# Altium PCB RechargeablePCB.PcbDoc
Units mil, origin at the board's own origin, x right, y up, seen from the top; angles counter-clockwise.
Board outline 2255 x 2330 mil, 2 copper layers (Top Layer, Bottom Layer); 23 components, 19 nets, 82 pads, 20 vias.
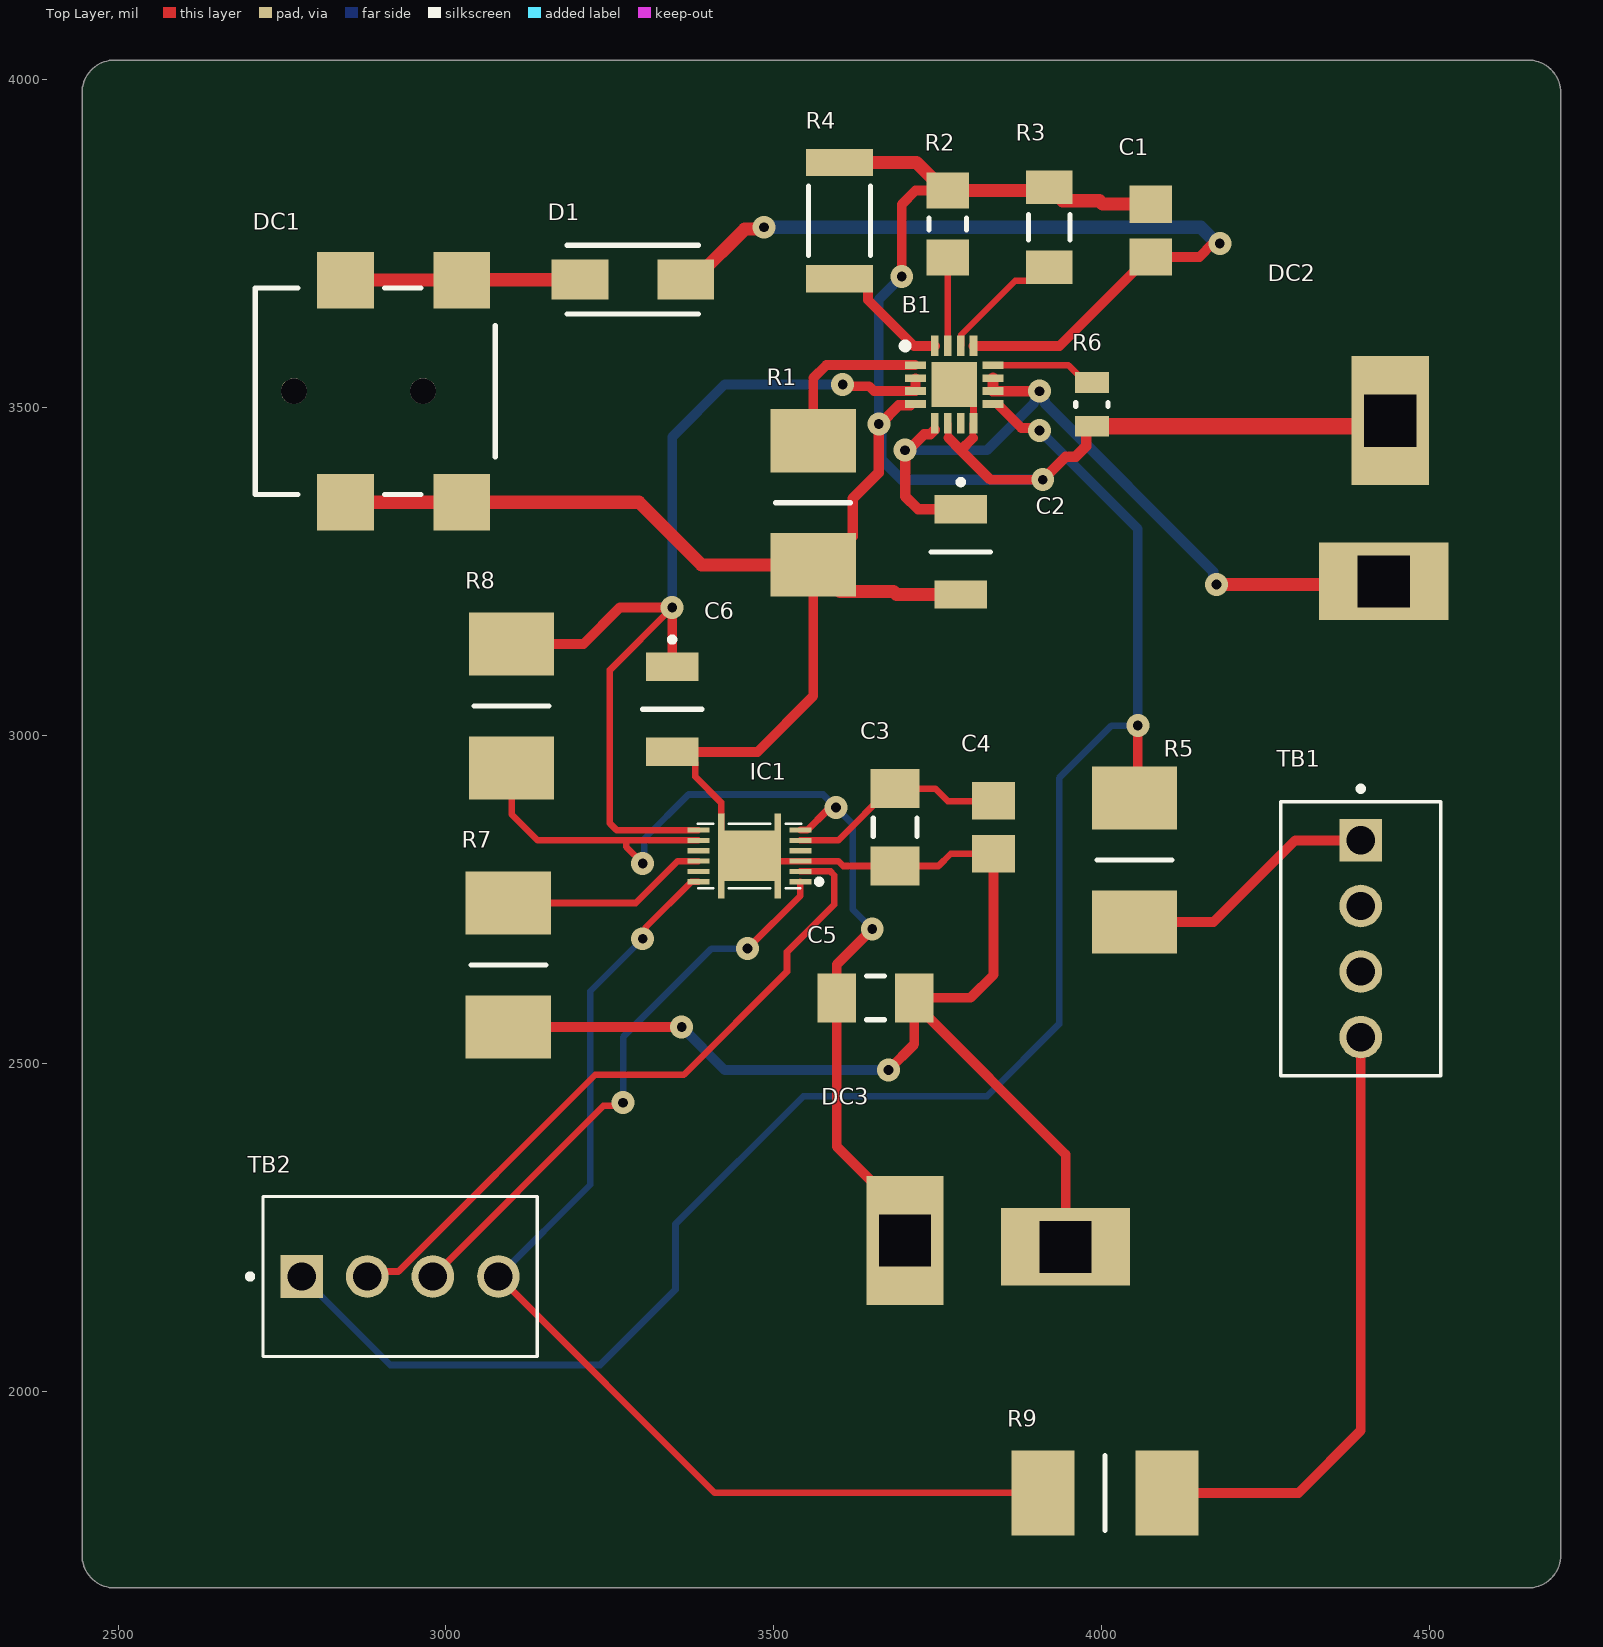
[diagram p0: Top Layer view]
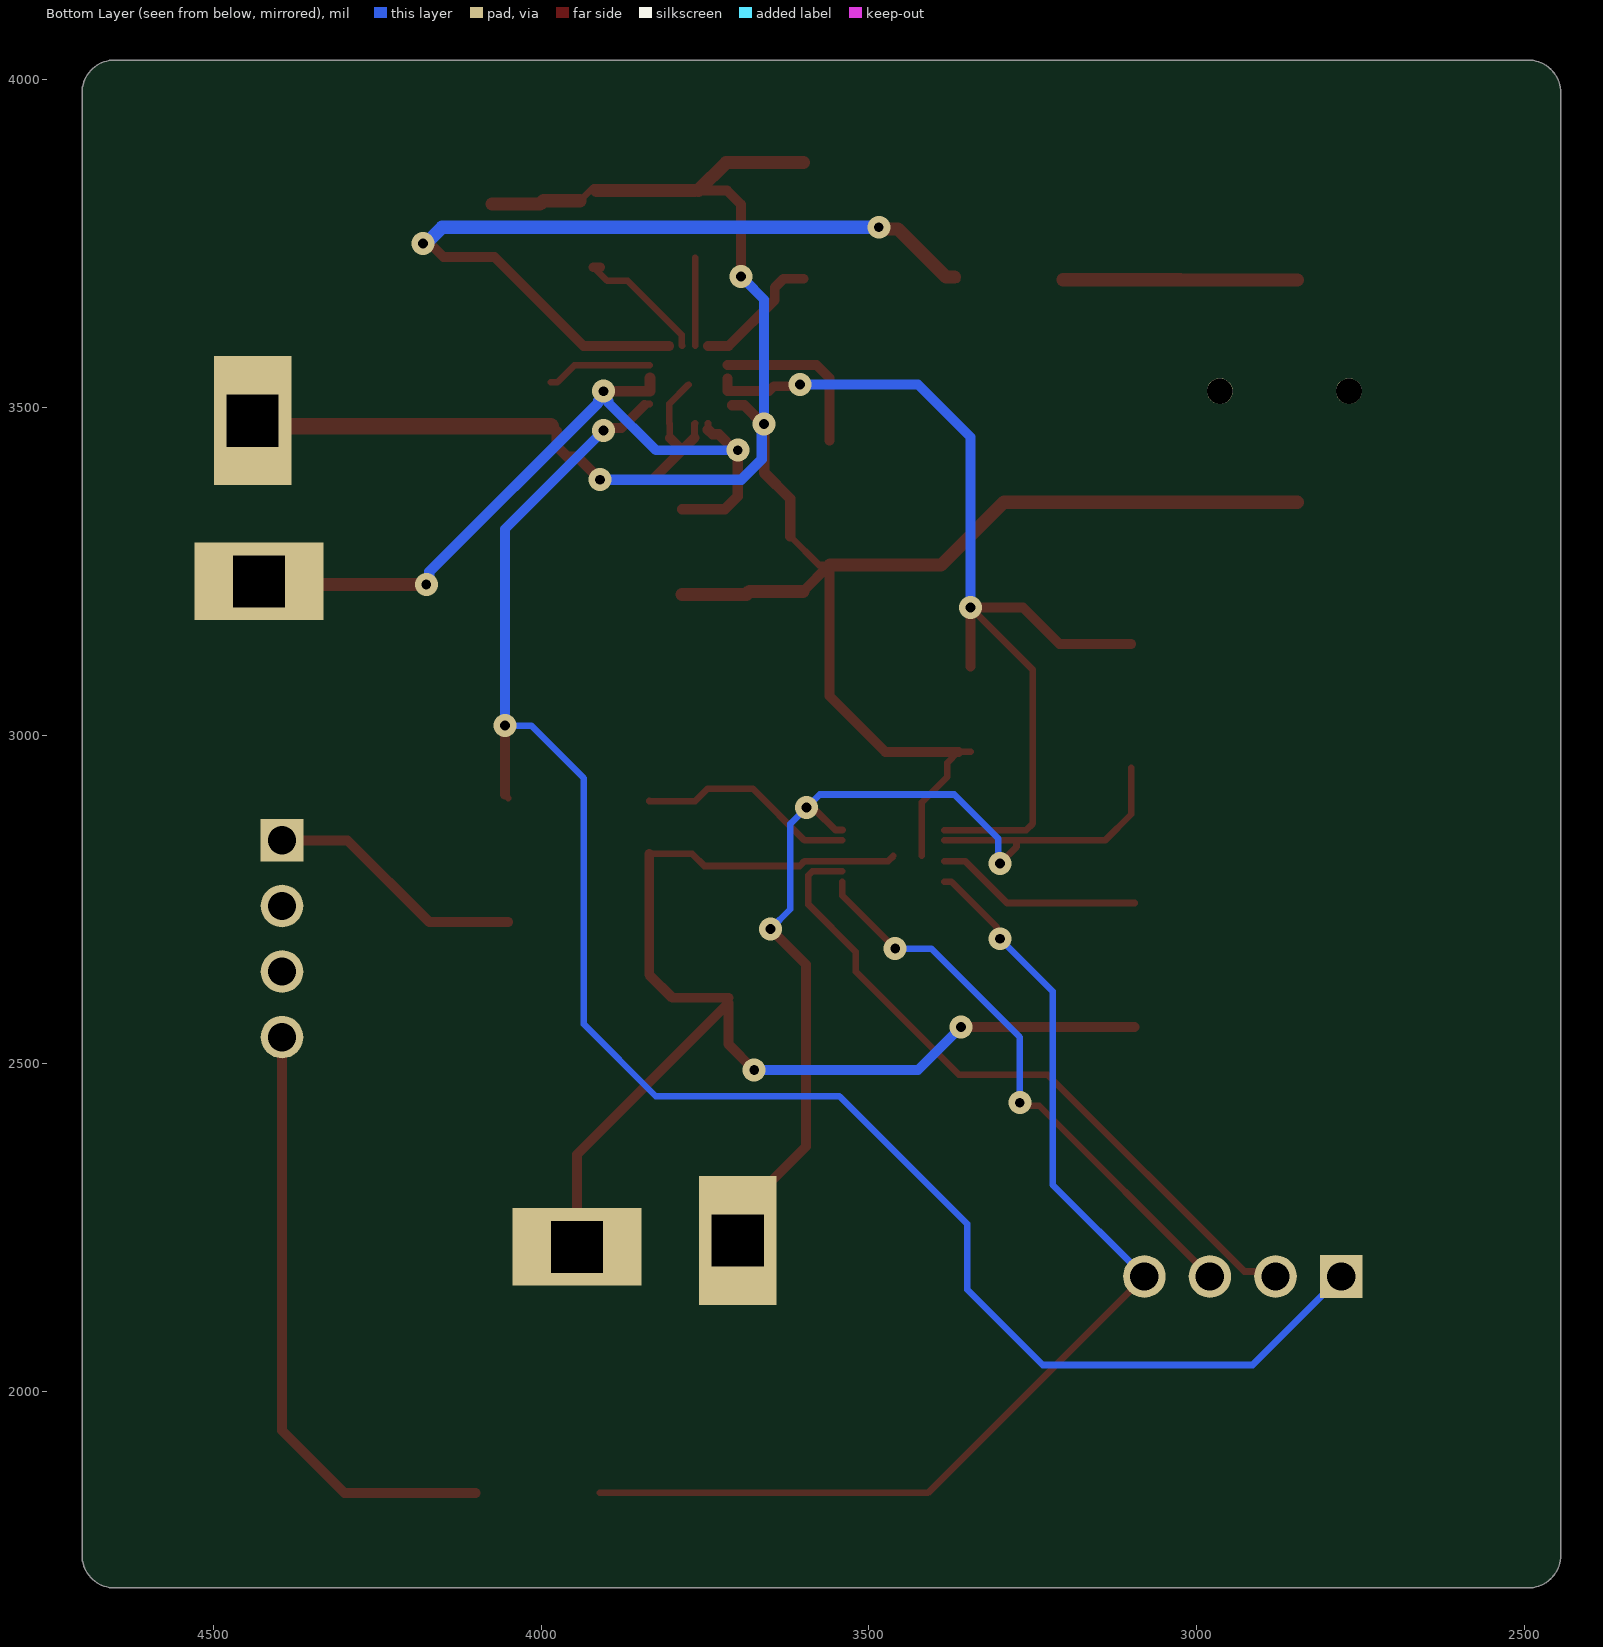
[diagram p1: Bottom Layer view, seen from below]
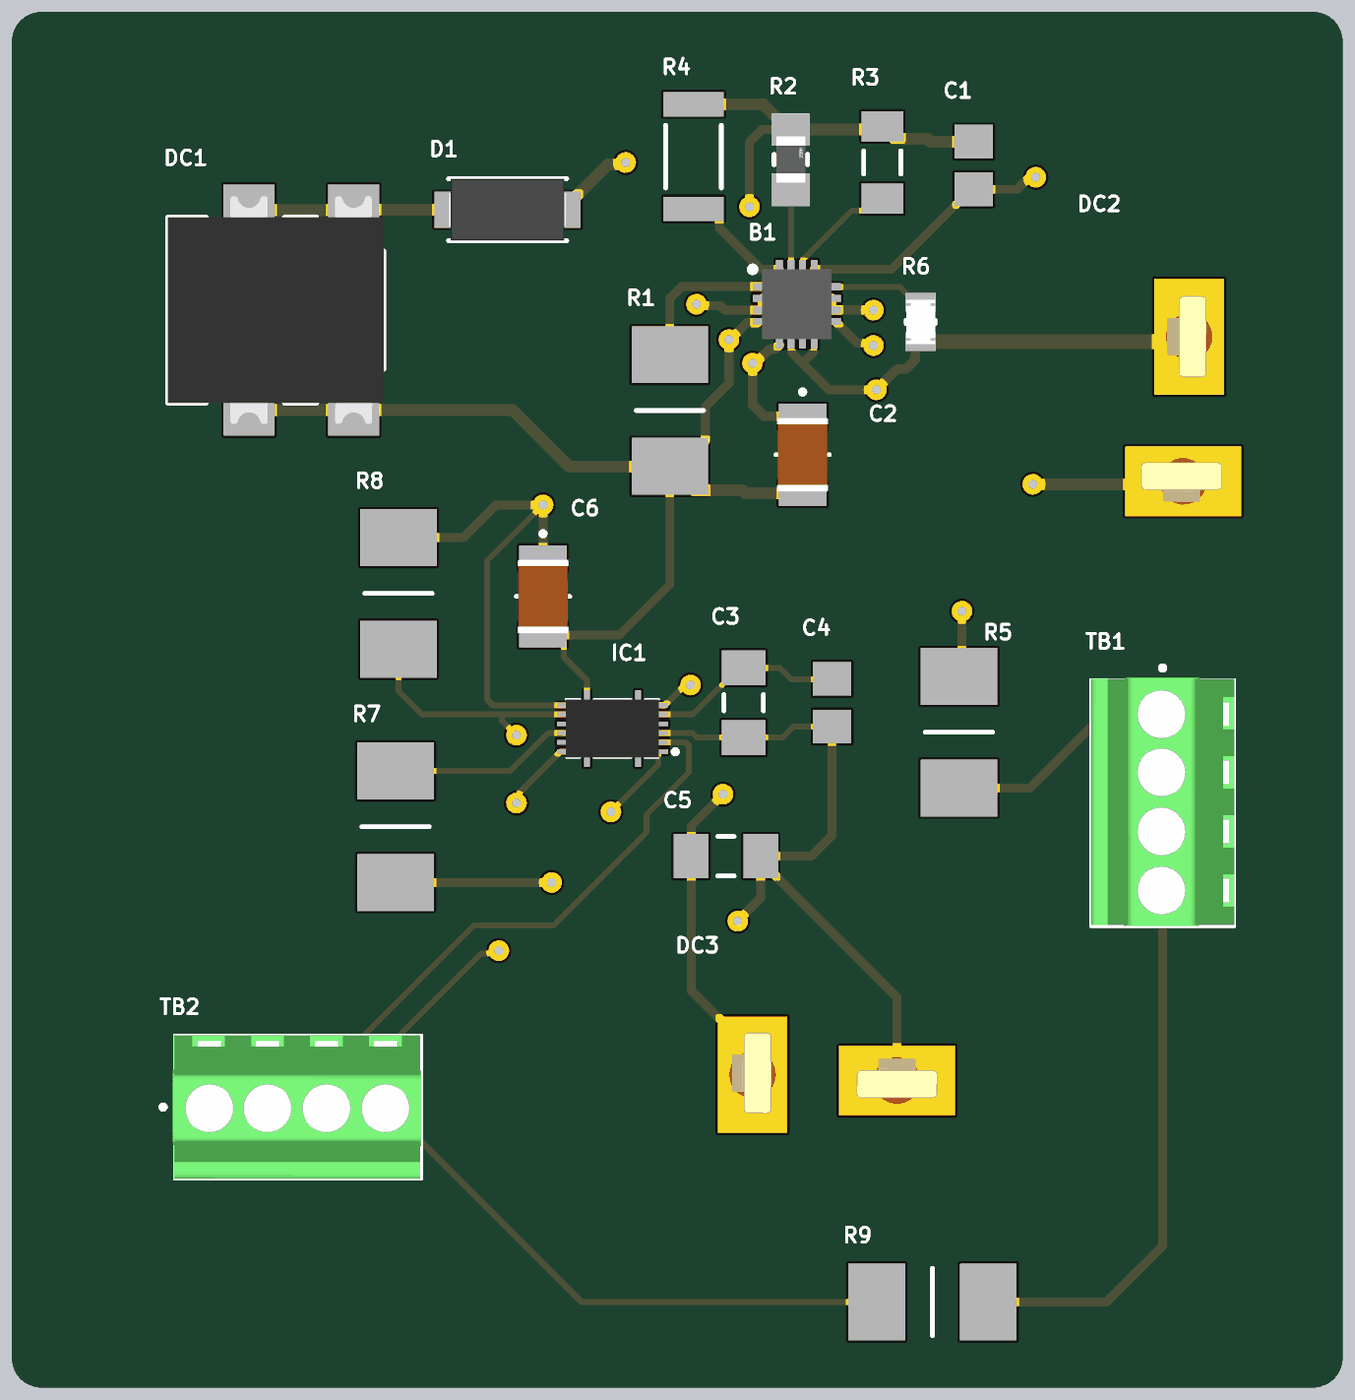
[diagram p2: 3D render of the assembled board from above, using the file's embedded part models]

## Layer stack, top to bottom
Top Solder: solder mask 0.4, Solder Resist, Dk 3.5
Top Layer: signal copper 1.4
Dielectric 1: dielectric 12.6, FR-4, Dk 4.8
Bottom Layer: signal copper 1.4
Bottom Solder: solder mask 0.4, Solder Resist, Dk 3.5

## Board outline
2445,1750 ccw(c2495,1750) 2495,1700 4650,1700 ccw(c4650,1750) 4700,1750 4700,3980 ccw(c4650,3980) 4650,4030 2495,4030 ccw(c2495,3980) 2445,3980

## Design rules (kind name [scope] priority, off if disabled: settings)
Clearance [All] p1: gap=5 ignorepadtopadclearanceinfootprint=FALSE
ComponentClearance [All] p1 off: gap=10 collisioncheckmode=3 verticalgap=10 showdistances=FALSE
DiffPairsRouting [All] p1: maxlimit=13 minlimit=13 mostfreqgap=13 toplayer_minwidth=7.42 toplayer_maxwidth=13 toplayer_prefwidth=7.42 bottomlayer_minwidth=7.42 bottomlayer_maxwidth=13 bottomlayer_prefwidth=7.42 maxuncoupledlength=500
FabricationTestPointUsage TestPointUsage [All] p1: valid=0 allowmultiple=FALSE
FabricationTestpoint Testpoint [All] p1: side=3 testpointundercomponent=TRUE minsize=40 maxsize=100 preferedsize=60 minholesize=20 maxholesize=40 preferedholesize=32 testpointgrid=1 allowsidetop=TRUE allowsidebottom=TRUE usegrid=TRUE gridtolerance=0.01
Height [All] p1 off: minheight=0 maxheight=1000 prefheight=500
HoleSize [All] p1: absolutevalues=TRUE maxlimit=800 minlimit=10 maxpercent=80.000 minpercent=20.000
MatchedLengths MatchedLengths_I210Rx [InNetClass('I210Rx')] p1: tolerance=5 checknetsindiffpair=FALSE checkdiffpairvsdiffpair=TRUE checkxsignals=TRUE checkothers=TRUE
MatchedLengths MatchedLengths_I210Tx [InNetClass('I210Tx')] p2: tolerance=5 checknetsindiffpair=FALSE checkdiffpairvsdiffpair=TRUE checkxsignals=TRUE checkothers=TRUE
MatchedLengths MatchedLengths_mSATARx [InNetClass('mSATARx')] p3: tolerance=25 checknetsindiffpair=FALSE checkdiffpairvsdiffpair=TRUE checkxsignals=TRUE checkothers=TRUE
MatchedLengths MatchedLengths_mSATATx [InNetClass('mSATATx')] p4: tolerance=25 checknetsindiffpair=FALSE checkdiffpairvsdiffpair=TRUE checkxsignals=TRUE checkothers=TRUE
MatchedLengths MatchedLengths_PCIECLK [InNetClass('PCIECLK')] p5: tolerance=25 checknetsindiffpair=FALSE checkdiffpairvsdiffpair=TRUE checkxsignals=TRUE checkothers=TRUE
MatchedLengths MatchedLengths_PCIETx [InNetClass('PCIETx')] p6: tolerance=5 checknetsindiffpair=FALSE checkdiffpairvsdiffpair=TRUE checkxsignals=TRUE checkothers=TRUE
MatchedLengths MatchedLengths_PCIERx [InNetClass('PCIERx')] p7: tolerance=5 checknetsindiffpair=FALSE checkdiffpairvsdiffpair=TRUE checkxsignals=TRUE checkothers=TRUE
MinimumSolderMaskSliver [All] p1: minsoldermaskwidth=5
PlaneConnect [All] p1: planeconnectstyle=Relief reliefexpansion=20 reliefentries=4 reliefconductorwidth=15 reliefairgap=10
PolygonConnect [All] p1: connectstyle=Direct reliefconductorwidth=20 reliefentries=4 polygonreliefangle="90 Angle" airgapwidth=30
RoutingVias [All] p1: holewidth=20 width=40 viastyle="Through Hole" minholewidth=15 minwidth=35 maxholewidth=28 maxwidth=50
SilkToSilkClearance [All] p1: silktosilkclearance=5
SilkToSolderMaskClearance SilkscreenOverComponentPads [IsPad] p1: minsilkscreentomaskgap=5 clearancetoexposedcopper=TRUE
SolderMaskExpansion [All] p1: expansion=4 istentingtop=FALSE
SupplyNets "Schematic Supply Nets" [InNet('GND')] p1: voltage=0.000
Width [All] p1: maxlimit=500 minlimit=5 preferedwidth=10
20 further rules are at their usual default settings.

## Components (designator, comment, footprint, x,y, rotation, side; value= is the part's Value field where it differs from the comment)
B1 "BQ24232HRGTR" QFN50P300X300X100-17N-D 3775,3535 r0 top
C1 "0.1uF 16V" CAPC2113X100X50ML30T10 4075,3770 r90 top
C2 "GRM32DR71C106KA01L" GRM32DR61C106KA01L 3785,3280 r270 top
C3 "C1206C105K3RACTU" CAPC3216X180X50ML20T25 3685,2860 r90 top
C4 "0.1uF 16V" CAPC2113X100X50ML30T10 3835,2860 r90 top
C5 "C1206C105K3RACTU" CAPC3216X180X50ML20T25 3655,2600 r180 top
C6 "GRM32DR71C106KA01L" GRM32DR61C106KA01L 3345,3040 r270 top
D1 "CDBA340L-G" DIONM5127X229N 3285,3695 r180 top
DC1 "694102107102" 694102107102 2892.16,3525 r270 top
DC2 "Deans Connector" Deans 4445,3480 r90 top
DC3 "Deans Connector" Deans 3945,2215 r0 top
IC1 "BQ27441DRZR-G1A" BQ27441DRZRG1A 3462.76,2816.38 r90 top
R1 "CRM2512QJW-103ELF" RESC6331X80N 3560,3355 r90 top
R2 "RG2012V-1431-B-T5" FP-RG2012-MFG 3765,3780 r90 top
R3 "CRCW120656K2FKEA" RESC3216X60X45ML10T20 3920,3775 r270 top
R4 "1K74 1% 2010(5025)" RESC2010(5025)_L 3600,3785 r90 top value="1740.00 Ohm"
R5 "CRM2512QJW-103ELF" RESC6331X80N 4050,2810 r270 top
R6 "CRCW08053K09FKEA" FP-CRCW0805-e3-IPC_C 3985,3505 r270 top
R7 "CRM2512QJW-103ELF" RESC6331X80N 3095,2650 r270 top
R8 "CRM2512QJW-103ELF" RESC6331X80N 3100,3045 r270 top
R9 "CRM2512QJW-103ELF" RESC6331X80N 4005,1845 r0 top
TB1 "TerminalBlock" PHOENIX_1725672 4272.95,2899.06 r270 top
TB2 "TerminalBlock" PHOENIX_1725672 2720.94,2052.95 r0 top

## Footprints (in the part's own frame and the unit in brackets; to place one, negate y for a bottom-side part, rotate by r counter-clockwise, add the part's x,y. Pads: shape width x height; smd on the part's side, far side on the other; paste and mask are expansions set on the pad)
694102107102 [mm] "DC Power Jack Right Angled Low Profile SMT ?3.9 with 4 soldering pads & pegs"
  rect 2.2x2.2 smd: 1(-4.3,3.35) 1(-4.3,-1.15) 2(4.3,-1.15) 3(4.3,3.35)
  round 1 hole 1 unplated: MH1(0,1.85) MH2(0,-3.15)
  silkscreen extent -4,-4.65 4,4.65, body extent -4.9,-4.65 4.9,4.65, height 5.32
BQ27441DRZRG1A [mm]
  rect 0.2x0.85 smd: 1(-1,-1.975) 2(-0.6,-1.975) 3(-0.2,-1.975) 4(0.2,-1.975) 5(0.6,-1.975) 6(1,-1.975) 7(1,1.975) 8(0.6,1.975) 9(0.2,1.975) 10(-0.2,1.975) 11(-0.6,1.975) 12(-1,1.975)
  rect 3.3x0.25 smd: 13(0,1.1) 13(0,-1.1)
  rect 1.95x1.95 smd: 13(0,0)
  silkscreen extent -1.25,-2.8 1.25,2, body extent -1.25,-2 1.25,2, height 1
CAPC2113X100X50ML30T10 [mm] "Chip Capacitor, 2-Leads, Body 2.10x1.25mm, IPC Low Density"
  rect 1.45x1.65 smd: 1(-1.025,0) 2(1.025,0)
  body extent -1.2,-0.77 1.2,0.77, height 1
CAPC3216X180X50ML20T25 [mm] "Chip Capacitor, 2-Leads, Body 3.40x1.80mm, IPC Low Density"
  rect 1.5x1.9 smd: 1(-1.5,0) 2(1.5,0)
  silkscreen extent -0.35,-0.85 0.35,0.85, body extent -1.7,-0.9 1.7,0.9, height 1.8
Deans [mm]
  rect 3x5 hole 2 square: 1(-6.223,0.381)
  rect 5x3 hole 2 square: 2(0,0.127)
  body extent -9.6,-3.3 4.77,5.01, height 4.2
DIONM5127X229N [mm]
  rect 2.2x1.55 smd: 1(-2.05,0) 2(2.05,0)
  silkscreen extent -2.55,-1.33 2.55,1.33, body extent -2.55,-1.33 2.55,1.33, height 2.29
FP-CRCW0805-e3-IPC_C [mil]
  rect 31.75x51.5 smd paste+0 mask+0: 1(-33.5,0) 2(33.5,0)
  silkscreen extent -3,-25 3,25, body extent -53,-31 53,31, height 10
FP-RG2012-MFG [mm]
  rect 1.4x1.65 smd paste+0 mask+0: 1(-1.3,0) 2(1.3,0)
  silkscreen extent -0.22,-0.72 0.22,0.72, body extent -2.1,-0.92 2.1,0.92, height 0.25
GRM32DR61C106KA01L [mm]
  rect 1.1x2.05 smd: 1(-1.65,0) 2(1.65,0)
  silkscreen extent -2.8,-1.15 0,1.15, body extent -1.6,-1.1 1.6,1.1, height 2.5
PHOENIX_1725672 [mm]
  rect 1.65x1.65 / inner round 1.65 / far side rect 1.65x1.65 hole 1.1: 1(1.5,3.1)
  round 1.65 hole 1.1: 2(4.04,3.1) 3(6.58,3.1) 4(9.12,3.1)
  silkscreen extent -0.6,0 10.62,6.2, body extent -0.08,0 10.6,6.2, height 8.5
QFN50P300X300X100-17N-D [mm]
  rect 0.8x0.3 smd: 1(-1.5,0.75) 2(-1.5,0.25) 3(-1.5,-0.25) 4(-1.5,-0.75) 9(1.5,-0.75) 10(1.5,-0.25) 11(1.5,0.25) 12(1.5,0.75)
  rect 0.3x0.8 smd: 5(-0.75,-1.5) 6(-0.25,-1.5) 7(0.25,-1.5) 8(0.75,-1.5) 13(0.75,1.5) 14(0.25,1.5) 15(-0.25,1.5) 16(-0.75,1.5)
  rect 1.75x1.75 smd: 17(0,0)
  silkscreen extent -2.02,1.38 -1.77,1.62, body extent -1.5,-1.5 1.5,1.5, height 1
RESC2010(5025)_L [mm] "Chip Resistor, Body 5.0x2.5mm, IPC High Density"
  rect 1.05x2.6 smd: 1(-2.25,0) 2(2.25,0)
  silkscreen extent -1.35,-1.2 1.35,1.2, body extent -2.6,-1.35 2.6,1.35, height 0.71
RESC3216X60X45ML10T20 [mm] "Chip Resistor, 2-Leads, Body 3.20x1.60mm, IPC Low Density"
  rect 1.3x1.8 smd: 1(-1.55,0) 2(1.55,0)
  silkscreen extent -0.5,-0.8 0.5,0.8, body extent -1.65,-0.85 1.65,0.85, height 0.6
RESC6331X80N [mm]
  rect 2.45x3.3 smd: 1(-2.4,0) 2(2.4,0)
  silkscreen extent 0,-1.45 0,1.45

## Part data
B1: "USB-Friendly Lithium Based Battery Charger With Power-Path For 4.35V Batteries", Manufacturer_Name="Texas Instruments", Mouser Part Number=595-BQ24232HRGTR, Datasheet Link=http://www.ti.com/lit/gpn/bq24232h, Geometry.Height=1mm, Manufacturer_Part_Number=BQ24232HRGTR, Mouser Price/Stock=https://www.mouser.co.uk/ProductDetail/Texas-Instruments/BQ24232HRGTR?qs=sU0fTKI0LunTvrHzq76tZQ%3D%3D
C1 C4: library part CMP-2007-00010-1, "C0805X104K4RACTU", Manufacturer=Kemet, Part Number=C0805X104K4RACTU
C2 C6: "Capacitor", Manufacturer_Name="Murata Electronics", Mouser Part Number=81-GRM32R71C106KA01L, Arrow Part Number=GRM32DR71C106KA01L, Arrow Price/Stock=https://www.arrow.com/en/products/grm32dr71c106ka01l/murata-manufacturing, Datasheet Link=http://www.murata.com/~/media/webrenewal/support/library/catalog/products/capacitor/mlcc/c02e.pdf, Height=2.2mm, Manufacturer_Part_Number=GRM32DR71C106KA01L, Mouser Price/Stock=https://www.mouser.co.uk/ProductDetail/Murata-Electronics/GRM32DR71C106KA01L?qs=%2FV5QxPF79G3iRcxyZgnthw%3D%3D
C3 C5: library part CMP-2000-04991-1, "Chip Capacitor, 1 uF, +/- 10%, 25 V, -55 to 125 degC, 1206 (3216 Metric), RoHS, Tape and Reel", Capacitance=1uF, Capacitance - nF=1000nF, Case Code - in=1206, Case Code - mm=3216, Case Height=1.6mm, Case Length=3.2mm, Dielectric=X7R, Manufacturer=Kemet, Maximum Operating Temperature=+125C, Minimum Operating Temperature=-55C, Operating Temperature Range=-55Cto+125C, Package / Case=1206(3216metric), Package Description="2-Pin Surface Mount Device, Body 3.2 x 1.6 mm", Temperature Coefficient / Code=+/-15%, Tolerance=10%, Voltage Rating=25V, Brand=Kemet, Case Width=1.6mm, Class=Class1, Datasheet URL=https://ciiva.com/datasheet-click-18194173?src=ciiva&sig=6daff8c4, Datasheet Version=Jul-14, Dimensions=1.6mmWx3.2mmLx1.6mmH, Factory Pack Quantity=2000, Manufacturer URL=http://www.kemet.com/, Package Reference=1206, Packaging=Reel, Product=GeneralTypeMLCCs, Product Category=MultilayerCeramicCapacitorsMLCC-SMD/SMT, RoHS=Details, Series=C1206C, Termination Style=SMD/SMT, Type=SMDMLCCX7R6.3-250VDCCommericalGrade, Voltage Rating DC=25V
D1: "Schottky Diode", Manufacturer_Name="Comchip Technology", Mouser Part Number=750-CDBA340L-G, Arrow Part Number=CDBA340L-G, Arrow Price/Stock=https://www.arrow.com/en/products/cdba340l-g/comchip-technology?region=nac, Datasheet Link=https://componentsearchengine.com/Datasheets/1/CDBA340L-G.pdf, Height=2.29mm, Manufacturer_Part_Number=CDBA340L-G, Mouser Price/Stock=https://www.mouser.co.uk/ProductDetail/Comchip-Technology/CDBA340L-G?qs=tw%252BuQ%2FB6PO0nFaxtl1KyCA%3D%3D
DC1: library part "DC Power Jack", Color=Black, Current Rating=5A, Flammability Rating="UL94 V-0", Insulation Resistance=100MΩ, Max Operating Temperature=85°C, Min Operating Temperature=-40°C, Operating Supply Voltage=18V, Connector Type=Power, Contact Gender=Female, Contact Plating=Tin, Gender=Male, Housing Material=Polyamide, Mount="Surface Mount", NexarPartId=52645180, Packaging="Tape and Reel", REACH SVHC=Unknown, RoHS=Compliant, Shielding=Unshielded, Termination=SMD/SMT, Voltage Rating=18V, Voltage Rating (DC)=18V
IC1: "Integrated Circuit", Manufacturer_Name="Texas Instruments", Mouser Part Number=595-BQ27441DRZR-G1A, Arrow Part Number=BQ27441DRZR-G1A, Arrow Price/Stock=https://www.arrow.com/en/products/bq27441drzr-g1a/texas-instruments?region=nac, Datasheet Link=http://www.ti.com/lit/gpn/bq27441-g1, Manufacturer_Part_Number=BQ27441DRZR-G1A, Mouser Price/Stock=https://www.mouser.co.uk/ProductDetail/Texas-Instruments/BQ27441DRZR-G1A?qs=vvk%2Fphg2gmMTlt0P9j2l8w%3D%3D
R1 R5 R7 R8 R9: "ResPowerQ 2512 10k 5% 2W TC200", Manufacturer_Name=Bourns, Mouser Part Number=652-CRM2512QJW-103E, Datasheet Link=http://www.bourns.com/data/global/pdfs/CRM0805_1206_2010.pdf, Geometry.Height=0.8mm, Manufacturer_Part_Number=CRM2512QJW-103ELF, Mouser Price/Stock=https://www.mouser.co.uk/ProductDetail/Bourns/CRM2512QJW-103ELF?qs=8Wlm6%252BaMh8Rzg3bRHdWGsA%3D%3D
R2: library part CMP-28537-000935-1, "Automotive Metal Thin Film Chip Resistor, 0805, 1.43kΩ, 0.1%, 5ppm/°C, 0.125W, 150V", Case Code (Imperial)=0805, Case Code (Metric)=2012, Max Operating Temperature=155°C, Max Power Dissipation=125mW, Min Operating Temperature=-55°C, Package Quantity=5000, Resistance=1.43kR, Resistor Type="Thin Film", Temperature Coefficient=5ppm/°C, Tolerance=0.1%, Voltage Rating=150V, Case/Package=0805, Features="Automotive AEC-Q200", Height=0.02inch, Lead Free="Lead Free", Length=0.079inch, Number of Terminations=2, Packaging="Tape and Reel", Power Rating=125mW, RoHS Compliant=Yes, Series=RG, Termination=SMD/SMT, Voltage Rating (DC)=150V, Weight=0.000194oz, Width=1.2mm
R3: library part CMP-2003-02284-1, Manufacturer="Vishay Dale", Part Number=CRCW120656K2FKEA
R4: library part CMP-1017-00535-1, "1K74 0.75W 1% 2010 (5025 Metric)  SMD", Case-EIA=2010, Case-Metric=5025, Power="0.75 W", Tolerance="1 %", Technology=SMT
R6: library part CMP-2001-03873-2, "RES Thick Film, 3.09kΩ, 1%, 0.125W, 100ppm/°C, 0805", Case Code (Imperial)=0805, Case Code (Metric)=2012, Max Operating Temperature=155°C, Max Power Dissipation=125mW, Min Operating Temperature=-55°C, Package Quantity=10, Resistance=3.09kR, Temperature Coefficient=100ppm/°C, Tolerance=1%, Voltage Rating=150V, Case/Package=0805, Composition="Thick Film", Contact Plating=Tin, Depth=1.25mm, Features="Automotive AEC-Q200", Height=0.02inch, Lead Free="Lead Free", Length=2mm, Military Standard=Not, Number of Pins=2, Number of Terminations=2, Packaging="Tape and Reel", Power Rating=125mW, Radiation Hardening=No, Termination=Solder, Voltage Rating (DC)=150V, Weight=0.000194oz, Width=0.049inch

## Via types
v1: diameter 35, hole 15, Top Layer to Bottom Layer, 20 vias

## Nets (pads, with @x,y where several pads share a name; then routed paths per layer and width w, separated by ;. In a path a pad name is that pad's centre, name@x,y a point inside that pad or via, vN(x,y) a via of type N, cw(c..) or ccw(c..) an arc to the next point about the centre after c; other vN are vias at no path point)
GND: B1.4 B1.6 B1.8 B1.17 C1.2 C2.2 C3.1 C4.1 C5.1 C6.2 DC1.2 DC1.3 DC2.2 DC3.2 IC1.3 IC1.13 R1.1 R2.2 R3.1 R4.2 R6.2 R7.2 | length 6010.4
  Top Layer w10: C6.2 3363.7,2975.04 3380.35,2958.39 3380.35,2936.91 3419.45,2897.82 IC1.13@3419.45,2816.38 ; v1(3359.49,2555.51) v1@3365,2550 ; IC1.13@3462.76,2816.38 3470.63,2808.5 IC1.3 3598.11,2808.5 3605.67,2800.94 C3.1 3750.94,2800.94 3769.65,2819.65 C4.1 ; R1.1@3559.49,3260 R1.1@3560,3260 ; R1.1 R1.1@3560,3260 ; R1.1@3619.96,3303.74 3576.22,3260 3560.51,3260 R1.1@3560,3260 ; C5.1@3714.06,2592.13 C5.1 ; R2.2@3760.08,3831.18 R2.2 ; B1.6 3766.06,3475.04 3766.06,3453.94 ; B1.17 3804.45,3505.55 3804.45,3476.02 B1.8 3803.62,3475.04 3803.62,3453.62 ; R3.1@3915.16,3831.18 R3.1 R3.1@3940.59,3815.43 ; DC2.2@4431.5,3471.5 DC2.2
  Top Layer w15: R7.2 v1(3359.49,2555.51) ; C6.2@3363.7,2975.04 3475.04,2975.04 3560,3060 R1.1@3560,3260 ; R1.1@3560.51,3260 R1.1@3600.73,3219.78 ; v1(3675,2490) 3714.06,2529.06 3714.06,2592.13 3945,2361.18 DC3.2 ; v1(3695,3700) 3695,3810 3716.18,3831.18 R2.2@3760.08,3831.18 ; C5.1 3800,2600 3835,2635 C4.1 ; 3766.06,3453.94 3785,3435 ; 3803.62,3453.62 3785,3435 ; v1(3910,3390) 3830,3390 3785,3435
  Top Layer w16: R1.1@3619.96,3303.74 3619.96,3360.97 3660,3401.01 v1(3660,3475) 3661.93,3475 3690.31,3503.38 B1.4@3708.2,3503.38 ; v1(3910,3390) 3945,3425 3960,3425 3976,3441 3976,3463.63 3983.87,3471.5 R6.2
  Top Layer w20: DC1.2 DC1.3 3294.29,3355.71 3390,3260 R1.1@3559.49,3260 ; R4.2 3717.68,3873.58 R2.2@3760.08,3831.18 ; R1.1@3600.73,3219.78 3682.43,3219.78 3687.18,3215.04 C2.2 ; R2.2 R3.1@3915.16,3831.18 ; R3.1@3940.59,3815.43 3996.44,3815.43 4001.52,3810.35 C1.2
  Top Layer w25: R6.2 DC2.2@4431.5,3471.5
  Bottom Layer w10: v1@3695,3693.24 v1(3695,3700)
  Bottom Layer w15: v1(3359.49,2555.51) 3425,2490 v1(3675,2490) ; v1(3660,3475) 3660,3665 3688.47,3693.47 3694.77,3693.47 v1@3695,3693.24
  Bottom Layer w16: v1(3660,3475) 3663.64,3471.36 3663.64,3421.36 3695,3390 v1(3910,3390)
NetB1_1: B1.1 R1.2 | length 259.9
  Top Layer w10: B1.1@3715.47,3565 B1.1
  Top Layer w15: R1.2 3560,3545 3580,3565 B1.1@3715.47,3565
NetB1_2: B1.2 B1.3 C6.1 IC1.7 R8.1 | length 1553.6
  Top Layer w10: v1(3345,3195) 3250,3100 3250,2865.86 3260.11,2855.75 IC1.7
  Top Layer w15: R8.1 3209.49,3139.49 3265,3195 v1(3345,3195) C6.1 ; v1(3605,3535) 3607.34,3532.66 3645,3532.66 3652.5,3525.16 B1.3 B1.2
  Bottom Layer w15: v1(3345,3195) 3345,3455 3425,3535 v1(3605,3535)
NetB1_5: B1.5 B1.10 B1.11 C2.1 DC2.1 | length 1226.8
  Top Layer w10: B1.5@3745,3475.47 B1.5 B1.5@3745.47,3466.1 ; C2.1 C2.1 ; B1.10 B1.10@3834.13,3525.08 ; v1@3904.92,3525.08 v1(3905,3525) ; DC2.1@4425,3230 DC2.1
  Top Layer w16: B1.5@3745.47,3466.1 3738.51,3459.14 3729.28,3459.14 3705.14,3435 v1(3700,3435) 3700,3365 3720,3345 C2.1 ; B1.10@3834.13,3525.08 v1@3904.92,3525.08
  Top Layer w17: B1.10 B1.11
  Top Layer w20: v1(4175,3230) DC2.1@4425,3230
  Bottom Layer w10: 3897.02,3507.02 v1@3897.02,3510.25 ; v1@3901.76,3515 v1@3905,3515 ; v1@3905,3518.24 v1(3905,3525) ; 3912.98,3507.02 v1@3912.98,3510.25 ; v1@4170.22,3234.78 v1(4175,3230)
  Bottom Layer w15: v1(3700,3435) 3825,3435 3897.02,3507.02 ; v1@3897.02,3510.25 v1@3901.76,3515
  Bottom Layer w16: v1@3905,3518.24 v1@3912.98,3510.25 ; 3912.98,3507.02 4170.22,3249.78 v1@4170.22,3234.78
NetB1_9: B1.9 R5.1 TB2.1 | length 2722.9
  Top Layer w10: B1.9 3839.09,3505.47 B1.9@3840,3504.57 ; R5.1 R5.1@4055,2909.49
  Top Layer w15: B1.9@3842.3,3503.88 3877.35,3468.83 3901.17,3468.83 v1(3905,3465) ; R5.1@4055,2909.49 v1(4055,3015)
  Bottom Layer w10: TB2.1 2915,2040 3235,2040 3350,2155 3350,2255 3545,2450 3825,2450 3935,2560 3935,2935 4015,3015 v1(4055,3015)
  Bottom Layer w15: v1(3905,3465) 4055,3315 v1(4055,3015)
NetB1_12: B1.12 R6.1 | length 161.7
  Top Layer w10: B1.12 3949.09,3564.53 3975.12,3538.5 R6.1
NetB1_13: B1.13 C1.1 D1.1 | length 1293.9
  Top Layer w10: D1.1 D1.1@3370,3699.29 ; v1@4169.18,3750 v1(4180,3750)
  Top Layer w15: B1.13 3935.47,3594.06 C1.1@4071.06,3729.65 ; C1.1 4148.82,3729.65 v1@4169.18,3750
  Top Layer w20: D1.1@3370,3699.29 3382.8,3699.29 3455.63,3772.13 3482.13,3772.13 v1(3485,3775)
  Bottom Layer w20: v1(3485,3775) 4150.94,3775 4175.94,3750 v1(4180,3750)
NetB1_14: B1.14 R3.2 | length 204.1
  Top Layer w10: B1.14 3785.75,3594.96 3785.75,3611.07 3868.06,3693.39 3899.41,3693.39 R3.2
  Top Layer w15: R3.2@3910.16,3713.98 R3.2
NetB1_15: B1.15 R2.1 | length 134.8
  Top Layer w10: R2.1 3765.16,3728.66 B1.15
NetB1_16: B1.16 R4.1 | length 199
  Top Layer w15: R4.1 3630.51,3696.42 3643.68,3683.25 3643.68,3664.25 3713.88,3594.06 B1.16
NetC3_2: C3.2 C4.2 IC1.5 | length 335.3
  Top Layer w10: IC1.5 3598.07,2840 3677.13,2919.06 C3.2 3745.94,2919.06 3765,2900 3834.65,2900 C4.2
NetC5_2: C5.2 DC3.1 IC1.6 IC1.8 R8.2 | length 1601.7
  Top Layer w10: R8.2 3100,2880 3140,2840 3275,2840 ; v1(3300,2805) 3275,2830 3275,2840 ; IC1.8 3275,2840 ; v1@3580.65,2885.22 3590.22,2885.22 v1(3595,2890) ; DC3.1 DC3.1@3700,2269.37
  Top Layer w11: IC1.6 3551.18,2855.75 v1@3580.65,2885.22
  Top Layer w15: v1(3650,2705) 3595.94,2650.94 C5.2 3595.94,2373.43 DC3.1@3700,2269.37
  Bottom Layer w10: v1(3300,2805) 3302.5,2807.5 3302.5,2842.5 3370,2910 3575,2910 v1(3595,2890) 3620,2865 3620,2735 v1(3650,2705)
NetD1_2: D1.2 DC1.1 | length 357.7
  Top Layer w15: DC1.1@3024.06,3694.29 DC1.1@3024.76,3695
  Top Layer w20: DC1.1@2846.89,3694.29 DC1.1@3024.06,3694.29 ; DC1.1@3024.76,3695 D1.2
NetIC1_1: IC1.1 TB2.3 | length 881
  Top Layer w10: TB2.3 3240.22,2435.22 3265.22,2435.22 v1(3270,2440) ; v1(3460,2675) 3540.51,2755.51 IC1.1
  Bottom Layer w10: v1(3270,2440) 3270,2540 3405,2675 v1(3460,2675)
NetIC1_2: IC1.2 TB2.2 | length 1063.6
  Top Layer w10: TB2.2 2887.56,2182.56 2927.48,2182.56 3227.68,2482.76 3362.76,2482.76 3520,2640 3520,2670 3592.24,2742.24 3592.24,2786.9 3586.39,2792.76 IC1.2
NetIC1_10: IC1.10 R7.1 | length 316.5
  Top Layer w10: R7.1 3289.49,2744.49 3353.5,2808.5 IC1.10
NetIC1_12: IC1.12 R9.1 TB2.4 | length 1701.8
  Top Layer w10: TB2.4 3410,1845 R9.1 ; v1(3300,2690) 3304.78,2694.78 3304.78,2707.46 3374.33,2777.01 IC1.12
  Bottom Layer w10: TB2.4 3220,2315 3220,2610 v1(3300,2690)
NetR5_2: R5.2 TB1.1 | length 396.6
  Top Layer w15: R5.2 4170.51,2715.51 4295,2840 TB1.1
NetR9_2: R9.2 TB1.4 | length 934.9
  Top Layer w15: R9.2 4300,1845 4395,1940 TB1.4
pads on no net: B1.7 DC1.MH1 DC1.MH2 IC1.4 IC1.9 IC1.11 TB1.2 TB1.3

## Silkscreen, mask and mechanical layers (free items; w line width, h text height)
Mechanical 1:
  lines w10: 2445,1750 ccw(c2495,1750) 2495,1700 4650,1700 ccw(c4650,1750) 4700,1750 4700,3980 ccw(c4650,3980) 4650,4030 2515,4030 2495,4030 ccw(c2495,3980) 2445,3980 2445,1750